# Altium PCB gecko3-template.PcbDoc
Units mm, origin at the board's own origin, x right, y up, seen from the top; angles counter-clockwise.
Board outline 85.5 x 54.02 mm, 2 copper layers (Top Layer, Bottom Layer), stack 0.146 mm thick; 4 components, 567 nets, 490 pads, 0 vias.
Unrouted connection lines stored in the file: 262.
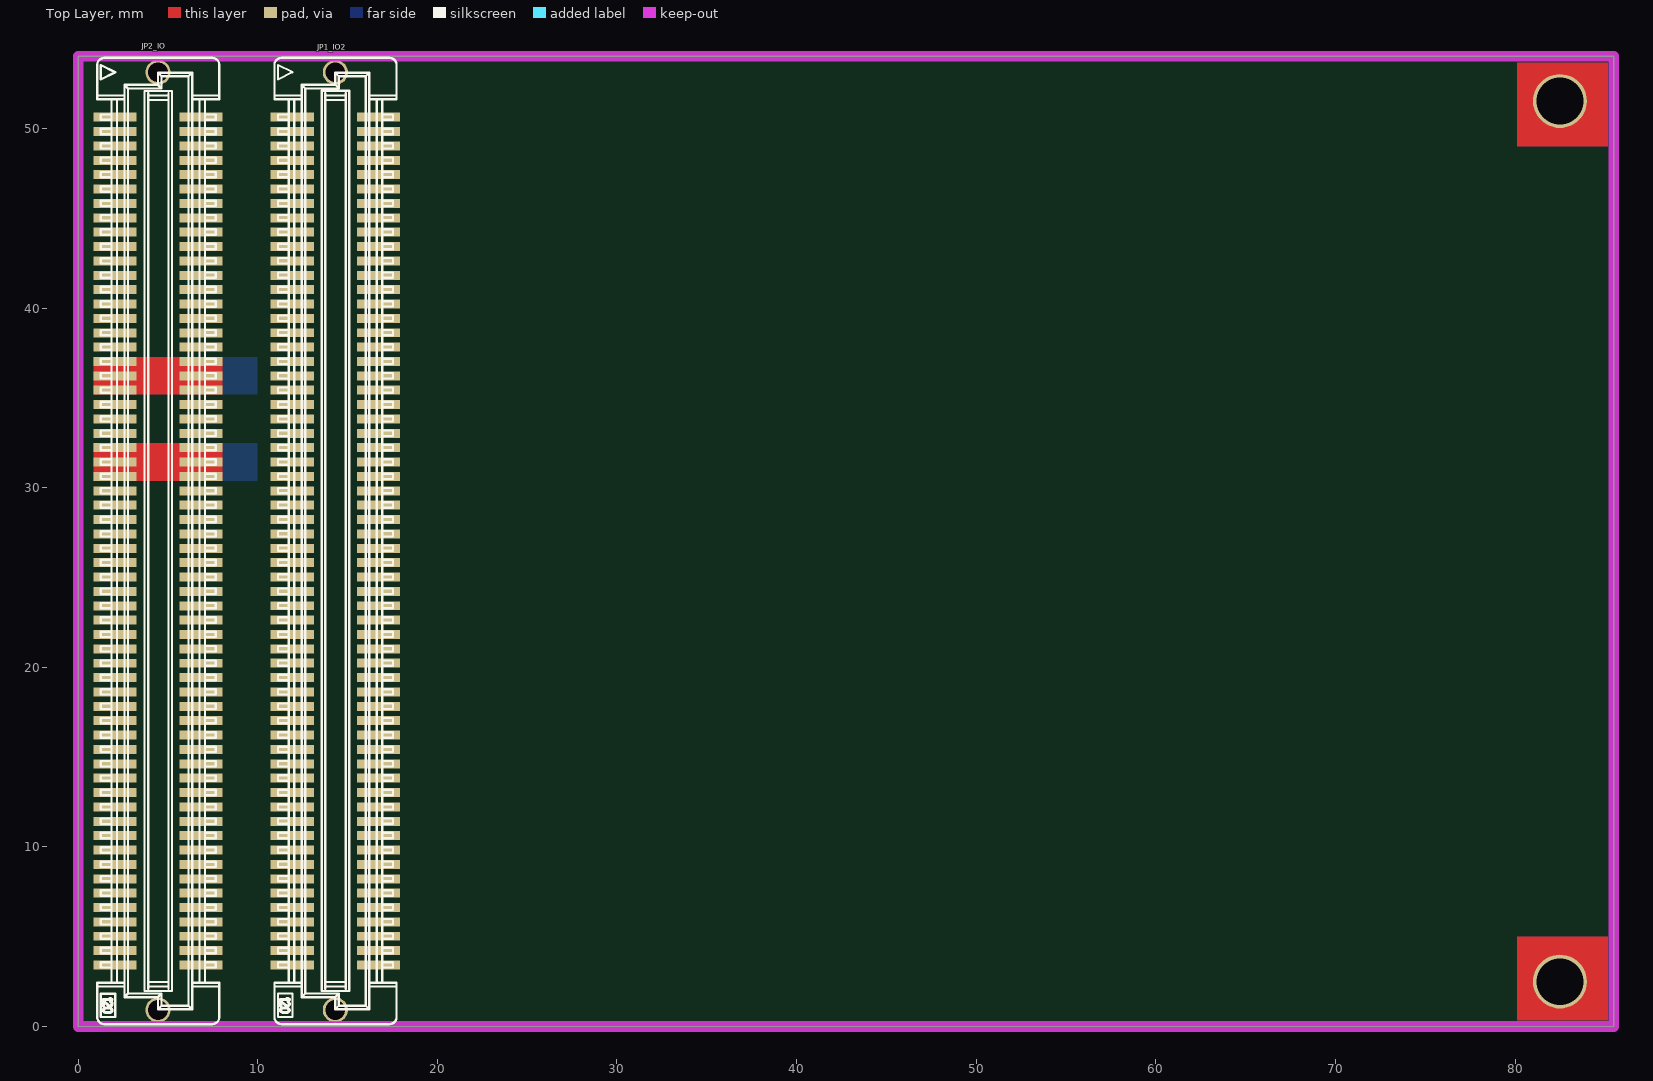
[diagram p0: Top Layer view]
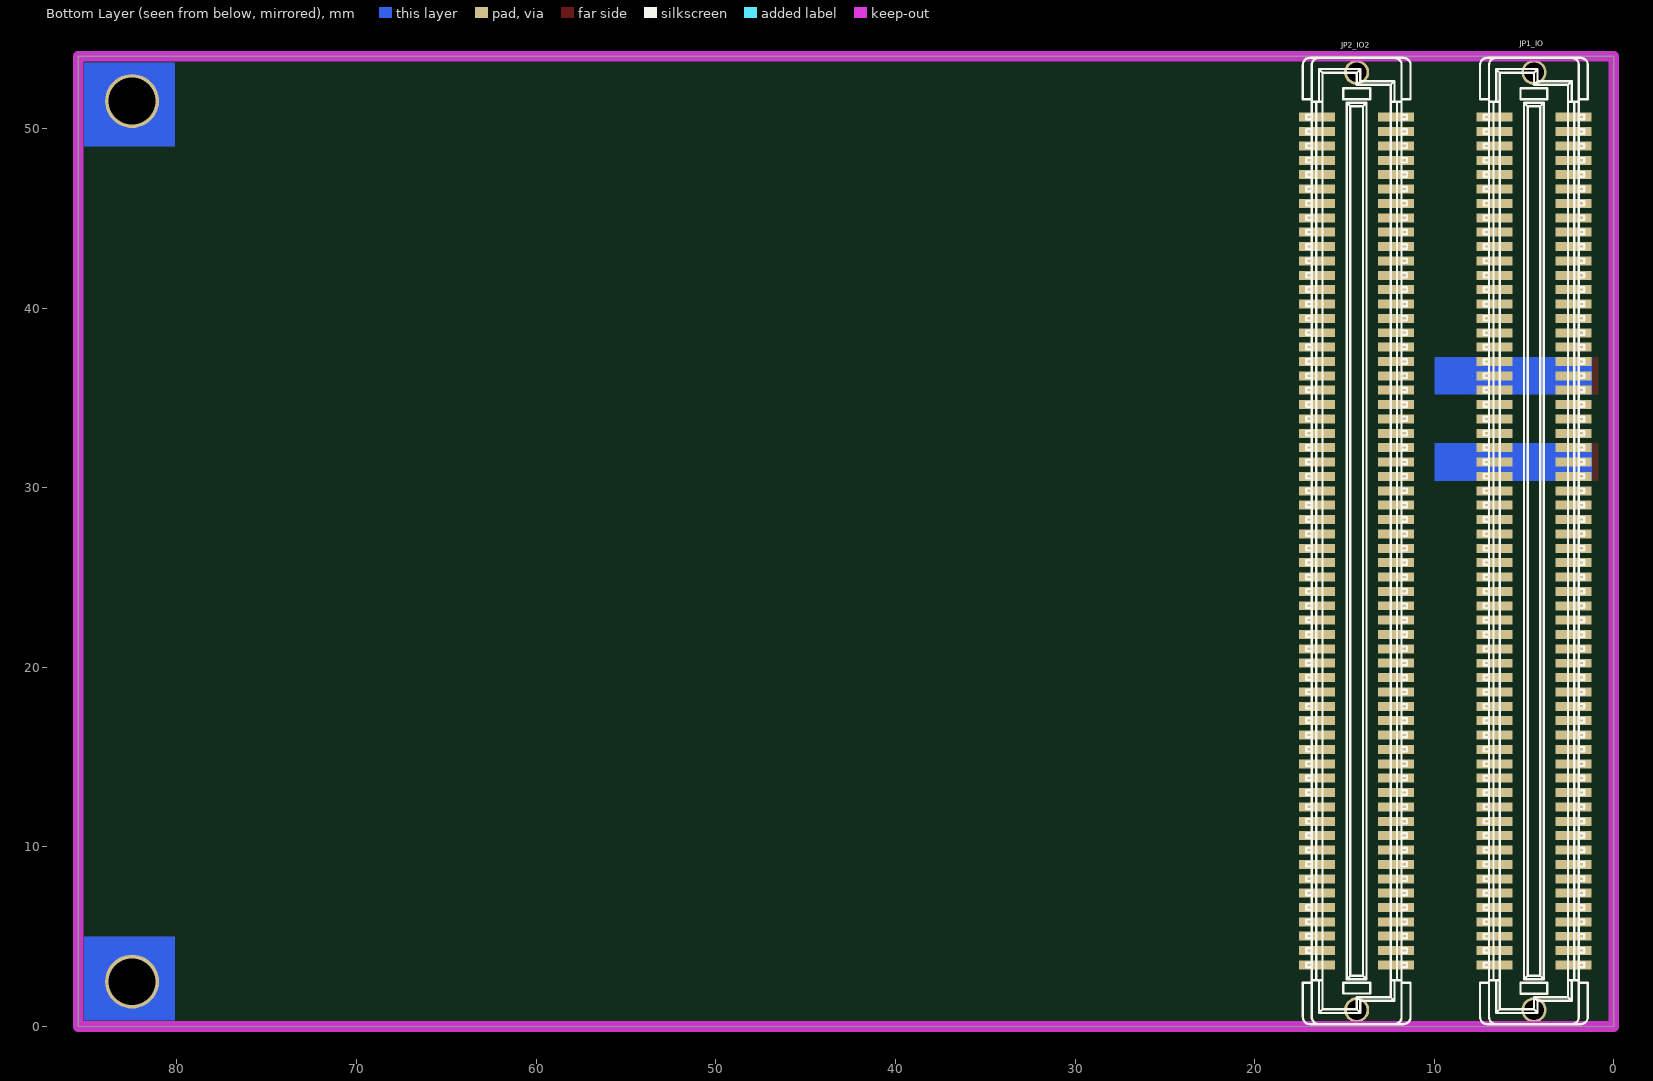
[diagram p1: Bottom Layer view, seen from below]

## Layer stack, top to bottom
Top Layer: signal copper 0.018
Dielectric: prepreg 0.11, FR-4, Dk 4.8
Bottom Layer: signal copper 0.018

## Board outline
0,0 0,54.025 85.5,54.025 85.5,0.025

## Design rules (kind name [scope] priority, off if disabled: settings)
Clearance Clearance_keepout [OnLayer('Keep-Out Layer')] p1: gap=0
Clearance Clearance_earth [InNet('EARTH')] p2: gap=0.6
Clearance Clearance_plane [InNet('1.2V') vs InNet('2.5V')] p3: gap=0.2
Clearance Clearance_1 [All] p4: gap=0.125
ComponentClearance [OnLayer('Multi-Layer')] p1: gap=0.2 collisioncheckmode=3 verticalgap=0
ComponentClearance ComponentClearanceBottom [OnLayer('Bottom Layer') vs OnLayer('Bottom Layer')] p2: gap=0.2 collisioncheckmode=2 verticalgap=0.254
ComponentClearance ComponentClearanceTop [OnLayer('Top Layer') vs OnLayer('Top Layer')] p3: gap=0.2 collisioncheckmode=2 verticalgap=0.254
DiffPairsRouting [All] p1: maxlimit=0.6 minlimit=0.254 mostfreqgap=0.254 toplayer_maxgap=0.254 bottomlayer_maxgap=0.254 maxuncoupledlength=12.7
Height Height_connector [InComponentClass('io-bus') Or InComponentClass('io-bus2')] p1: minheight=0 maxheight=25.4 prefheight=12.7
Height "Height on back side" [OnLayer('Bottom Layer')] p2: minheight=0 maxheight=2 prefheight=1
HoleSize [All] p1: absolutevalues=TRUE maxlimit=5 minlimit=0.15 maxpercent=80.000 minpercent=20.000
MatchedLengths "Schematic Matched Net Lengths_4" [InNetClass('ram')] p1: tolerance=3.6 amplitude=2.54 gap=0.508 style=90-Degree
MatchedLengths "Schematic Matched Net Lengths_3" [InNetClass('ram')] p2: tolerance=3.6 amplitude=2.54 gap=0.508 style=90-Degree
MatchedLengths "Schematic Matched Net Lengths_2" [InNetClass('ram-clock')] p3: tolerance=1 amplitude=2.54 gap=0.508 style=90-Degree
MatchedLengths "Schematic Matched Net Lengths_1" [InNetClass('ram-clock')] p4: tolerance=1 amplitude=2.54 gap=0.508 style=90-Degree
MatchedLengths "Schematic Matched Net Lengths" [InNetClass('usb-d')] p5: tolerance=1 amplitude=2.54 gap=0.508 style=90-Degree
MaxMinImpedance "Schematic Impedance Constraint_4" [InNetClass('usb-d')] p1: minimum=79.00 maximum=100.0
MaxMinImpedance "Schematic Impedance Constraint_3" [InNetClass('ram')] p2: minimum=40.00 maximum=70.00
MaxMinImpedance "Schematic Impedance Constraint_2" [InNetClass('ram')] p3: minimum=40.00 maximum=70.00
MaxMinImpedance "Schematic Impedance Constraint_1" [InNetClass('ram-clock')] p4: minimum=40.00 maximum=70.00
MaxMinImpedance "Schematic Impedance Constraint" [InNetClass('ram-clock')] p5: minimum=40.00 maximum=70.00
MaximumViaCount "Schematic Maximum Via Count Constraint_3" [InNetClass('ram-clock')] p1: limit=2
MaximumViaCount "Schematic Maximum Via Count Constraint_2" [InNetClass('ram-clock')] p2: limit=2
MaximumViaCount "Schematic Maximum Via Count Constraint_1" [InNetClass('ram')] p3: limit=2
MaximumViaCount "Schematic Maximum Via Count Constraint" [InNetClass('ram')] p4: limit=2
OvershootFalling "Schematic Overshoot - Falling Edge_3" [InNetClass('ram')] p1: maximum=300.0m
OvershootFalling "Schematic Overshoot - Falling Edge_2" [InNetClass('ram-clock')] p2: maximum=300.0m
OvershootFalling "Schematic Overshoot - Falling Edge_1" [InNetClass('ram-clock')] p3: maximum=300.0m
OvershootFalling "Schematic Overshoot - Falling Edge" [InNetClass('ram')] p4: maximum=300.0m
OvershootRising "Schematic Overshoot - Rising Edge_3" [InNetClass('ram-clock')] p1: maximum=300.0m
OvershootRising "Schematic Overshoot - Rising Edge_2" [InNetClass('ram')] p2: maximum=300.0m
OvershootRising "Schematic Overshoot - Rising Edge_1" [InNetClass('ram-clock')] p3: maximum=300.0m
OvershootRising "Schematic Overshoot - Rising Edge" [InNetClass('ram')] p4: maximum=300.0m
PlaneClearance [All] p1: clearance=0.2
PlaneConnect [All] p1: planeconnectstyle=Direct reliefexpansion=0.508 reliefentries=4 reliefconductorwidth=0.254 reliefairgap=0.254
PolygonConnect [All] p1: connectstyle=Direct reliefconductorwidth=0.254 reliefentries=4 polygonreliefangle="90 Angle"
RoomDefinition io-bus [InComponentClass('io-bus')] p1: confinementstyle=ConfineIn formatcopy=TRUE lockcomponents=FALSE outline 0.536,-0.186 0.536,54.249 0.936,54.249 7.964,54.249 8.364,54.249 8.364,54.248 8.364,-0.186
RoomDefinition io-bus2 [InComponentClass('io-bus2')] p2: confinementstyle=ConfineIn formatcopy=TRUE lockcomponents=FALSE outline 10.404,-0.186 10.404,54.249 10.804,54.25 17.832,54.25 18.232,54.249 18.232,-0.186
RoutingVias [All] p1: holewidth=0.2 width=0.45 viastyle="Through Hole" minholewidth=0.15 minwidth=0.35 maxholewidth=1 maxwidth=2
SignalStimulus "Schematic Signal Stimulus_3" [InNetClass('ram')] p1: kind=2 level=0 starttime=0.000 stoptime=1.800n periodtime=3.600n
SignalStimulus "Schematic Signal Stimulus_2" [InNetClass('ram-clock')] p2: kind=2 level=0 starttime=0.000 stoptime=1.800n periodtime=3.600n
SignalStimulus "Schematic Signal Stimulus_1" [InNetClass('ram')] p3: kind=2 level=0 starttime=0.000 stoptime=1.800n periodtime=3.600n
SignalStimulus "Schematic Signal Stimulus" [InNetClass('ram-clock')] p4: kind=2 level=0 starttime=0.000 stoptime=1.800n periodtime=3.600n
SolderMaskExpansion [All] p1: expansion=0.102
SupplyNets "Schematic Supply Nets_4" [InNet('2.5V')] p1: voltage=2.500
SupplyNets "Schematic Supply Nets_5" [InNet('2.5V')] p2: voltage=2.500
SupplyNets "Schematic Supply Nets_2" [InNet('VREF')] p3: voltage=1.250
SupplyNets "Schematic Supply Nets_3" [InNet('VREF')] p4: voltage=1.250
SupplyNets "Schematic Supply Nets" [InNet('GND')] p5: voltage=0.000
SupplyNets "Schematic Supply Nets_1" [InNet('GND')] p6: voltage=0.000
TestPointUsage [All] p1: valid=0 allowmultiple=FALSE
Testpoint [All] p1: side=15 testpointundercomponent=TRUE minsize=1.016 maxsize=2.54 preferedsize=1.524 minholesize=0 maxholesize=1.016 preferedholesize=0.813 testpointgrid=0.025 style=1023 order=0-112345678
UndershootFalling "Schematic Undershoot - Falling Edge_3" [InNetClass('ram')] p1: maximum=300.0m
UndershootFalling "Schematic Undershoot - Falling Edge_2" [InNetClass('ram')] p2: maximum=300.0m
UndershootFalling "Schematic Undershoot - Falling Edge_1" [InNetClass('ram-clock')] p3: maximum=300.0m
UndershootFalling "Schematic Undershoot - Falling Edge" [InNetClass('ram-clock')] p4: maximum=300.0m
UndershootRising "Schematic Undershoot - Rising Edge_3" [InNetClass('ram')] p1: maximum=300.0m
UndershootRising "Schematic Undershoot - Rising Edge_2" [InNetClass('ram')] p2: maximum=300.0m
UndershootRising "Schematic Undershoot - Rising Edge_1" [InNetClass('ram-clock')] p3: maximum=300.0m
UndershootRising "Schematic Undershoot - Rising Edge" [InNetClass('ram-clock')] p4: maximum=300.0m
Width [All] p1: maxlimit=5 minlimit=0.1 preferedwidth=0.2 minimp=50.000000 maximp=50.000000 favimp=50.000000
13 further rules are at their usual default settings.

## Classes and differential pairs
net class ram: DRAM_A0_0 DRAM_A0_1 DRAM_A0_2 DRAM_A0_3 DRAM_A0_4 DRAM_A0_5 DRAM_A0_6 DRAM_A0_7 DRAM_A0_8 DRAM_A0_9 DRAM_A0_10 DRAM_A0_11 DRAM_A0_12 DRAM_A0_13 DRAM_A1_0 DRAM_A1_1 DRAM_A1_2 DRAM_A1_3 DRAM_A1_4 DRAM_A1_5 DRAM_A1_6 DRAM_A1_7 DRAM_A1_8 DRAM_A1_9 DRAM_A1_10 DRAM_A1_11 DRAM_A1_12 DRAM_A1_13 DRAM_BA0_0 DRAM_BA0_1 DRAM_BA1_0 DRAM_BA1_1 DRAM_C\A\S\0 DRAM_C\A\S\1 DRAM_C\K\0 DRAM_C\K\1 DRAM_C\S\0 DRAM_C\S\1 DRAM_CK0 DRAM_CK0_FB DRAM_CK1 DRAM_CK1_FB DRAM_CKE0 DRAM_CKE1 DRAM_D0_0 DRAM_D0_1 DRAM_D0_2 DRAM_D0_3 DRAM_D0_4 DRAM_D0_5 DRAM_D0_6 DRAM_D0_7 DRAM_D0_8 DRAM_D0_9 DRAM_D0_10 DRAM_D0_11 DRAM_D0_12 DRAM_D0_13 DRAM_D0_14 DRAM_D0_15 DRAM_D1_0 DRAM_D1_1 DRAM_D1_2 DRAM_D1_3 DRAM_D1_4 DRAM_D1_5 DRAM_D1_6 DRAM_D1_7 DRAM_D1_8 DRAM_D1_9 DRAM_D1_10 DRAM_D1_11 DRAM_D1_12 DRAM_D1_13 DRAM_D1_14 DRAM_D1_15 DRAM_LDM0 DRAM_LDM1 DRAM_LDQS0 DRAM_LDQS1 DRAM_R\A\S\0 DRAM_R\A\S\1 DRAM_UDM0 DRAM_UDM1 DRAM_UDQS0 DRAM_UDQS1 DRAM_W\E\0 DRAM_W\E\1
net class ram-clock: DRAM_C\K\0 DRAM_C\K\1 DRAM_CK0 DRAM_CK0_FB DRAM_CK1 DRAM_CK1_FB
net class FLASH_A[0..23]: FLASH_A0 FLASH_A1 FLASH_A2 FLASH_A3 FLASH_A4 FLASH_A5 FLASH_A6 FLASH_A7 FLASH_A8 FLASH_A9 FLASH_A10 FLASH_A11 FLASH_A12 FLASH_A13 FLASH_A14 FLASH_A15 FLASH_A16 FLASH_A17 FLASH_A18 FLASH_A19 FLASH_A20 FLASH_A21 FLASH_A22 FLASH_A23
net class DRAM_D1_[0..15]: DRAM_D1_0 DRAM_D1_1 DRAM_D1_2 DRAM_D1_3 DRAM_D1_4 DRAM_D1_5 DRAM_D1_6 DRAM_D1_7 DRAM_D1_8 DRAM_D1_9 DRAM_D1_10 DRAM_D1_11 DRAM_D1_12 DRAM_D1_13 DRAM_D1_14 DRAM_D1_15
net class DRAM_D0_[0..15]: DRAM_D0_0 DRAM_D0_1 DRAM_D0_2 DRAM_D0_3 DRAM_D0_4 DRAM_D0_5 DRAM_D0_6 DRAM_D0_7 DRAM_D0_8 DRAM_D0_9 DRAM_D0_10 DRAM_D0_11 DRAM_D0_12 DRAM_D0_13 DRAM_D0_14 DRAM_D0_15 DRAM_DQ0 DRAM_DQ1 DRAM_DQ2 DRAM_DQ3 DRAM_DQ4 DRAM_DQ5 DRAM_DQ6 DRAM_DQ7 DRAM_DQ8 DRAM_DQ9 DRAM_DQ10 DRAM_DQ11 DRAM_DQ12 DRAM_DQ13 DRAM_DQ14 DRAM_DQ15
component class fpga2: C1_FP2 C2_FP2
net class D[0..15]: D0 D1 D2 D3 D4 D5 D6 D7 D8 D9 D10 D11 D12 D13 D14 D15
net class ENCODER[0..7]: ENCODER0 ENCODER1 ENCODER2 ENCODER3 ENCODER4 ENCODER5 ENCODER6 ENCODER7
net class PWM[0..7]: PWM0 PWM1 PWM2 PWM3 PWM4 PWM5 PWM6 PWM7
net class SWITCH[0..3]: SWITCH0 SWITCH1 SWITCH2 SWITCH3
component class io-bus2: JP1_IO2 JP2_IO2
component class spi-flash: U1_SPI
net class LED[0..7]: LED0 LED1 LED2 LED3 LED4 LED5 LED6 LED7
net class RXD_[0..3]: RXD_0 RXD_1 RXD_2 RXD_3
net class TXD_[0..3]: TXD_0 TXD_1 TXD_2 TXD_3
net class usb-d: NetJP1_USB_D+ NetJP1_USB_D-
net class BUTTON[0..2]: BUTTON0 BUTTON1 BUTTON2
net class DRAM_A0_[0..13]: DRAM_A0 DRAM_A0_0 DRAM_A0_1 DRAM_A0_2 DRAM_A0_3 DRAM_A0_4 DRAM_A0_5 DRAM_A0_6 DRAM_A0_7 DRAM_A0_8 DRAM_A0_9 DRAM_A0_10 DRAM_A0_11 DRAM_A0_12 DRAM_A0_13 DRAM_A1 DRAM_A2 DRAM_A3 DRAM_A4 DRAM_A5 DRAM_A6 DRAM_A7 DRAM_A8 DRAM_A9 DRAM_A10 DRAM_A11 DRAM_A12 DRAM_A13
net class DRAM_A1_[0..13]: DRAM_A1_0 DRAM_A1_1 DRAM_A1_2 DRAM_A1_3 DRAM_A1_4 DRAM_A1_5 DRAM_A1_6 DRAM_A1_7 DRAM_A1_8 DRAM_A1_9 DRAM_A1_10 DRAM_A1_11 DRAM_A1_12 DRAM_A1_13 DRAM_A1_14 DRAM_A1_15
net class FLASH_D0_[0..15]: FLASH_D0_0 FLASH_D0_1 FLASH_D0_2 FLASH_D0_3 FLASH_D0_4 FLASH_D0_5 FLASH_D0_6 FLASH_D0_7 FLASH_D0_8 FLASH_D0_9 FLASH_D0_10 FLASH_D0_11 FLASH_D0_12 FLASH_D0_13 FLASH_D0_14 FLASH_D0_15
net class FLASH_D1_[0..15]: FLASH_D1_0 FLASH_D1_1 FLASH_D1_2 FLASH_D1_3 FLASH_D1_4 FLASH_D1_5 FLASH_D1_6 FLASH_D1_7 FLASH_D1_8 FLASH_D1_9 FLASH_D1_10 FLASH_D1_11 FLASH_D1_12 FLASH_D1_13 FLASH_D1_14 FLASH_D1_15
net class GPIO1_[0..51]: GPIO1_0 GPIO1_1 GPIO1_2 GPIO1_3 GPIO1_4 GPIO1_5 GPIO1_6 GPIO1_7 GPIO1_8 GPIO1_9 GPIO1_10 GPIO1_11 GPIO1_12 GPIO1_13 GPIO1_14 GPIO1_15 GPIO1_16 GPIO1_17 GPIO1_18 GPIO1_19 GPIO1_20 GPIO1_21 GPIO1_22 GPIO1_23 GPIO1_24 GPIO1_25 GPIO1_26 GPIO1_27 GPIO1_28 GPIO1_29 GPIO1_30 GPIO1_31 GPIO1_32 GPIO1_33 GPIO1_34 GPIO1_35 GPIO1_36 GPIO1_37 GPIO1_38 GPIO1_39 GPIO1_40 GPIO1_41 GPIO1_42 GPIO1_43 GPIO1_44 GPIO1_45 GPIO1_46 GPIO1_47 GPIO1_48 GPIO1_49 GPIO1_50 GPIO1_51
net class GPIO2_[0..115]: GPIO2_0 GPIO2_1 GPIO2_2 GPIO2_3 GPIO2_4 GPIO2_5 GPIO2_6 GPIO2_7 GPIO2_8 GPIO2_9 GPIO2_10 GPIO2_11 GPIO2_12 GPIO2_13 GPIO2_14 GPIO2_15 GPIO2_16 GPIO2_17 GPIO2_18 GPIO2_19 GPIO2_20 GPIO2_21 GPIO2_22 GPIO2_23 GPIO2_24 GPIO2_25 GPIO2_26 GPIO2_27 GPIO2_28 GPIO2_29 GPIO2_30 GPIO2_31 GPIO2_32 GPIO2_33 GPIO2_34 GPIO2_35 GPIO2_36 GPIO2_37 GPIO2_38 GPIO2_39 GPIO2_40 GPIO2_41 GPIO2_42 GPIO2_43 GPIO2_44 GPIO2_45 GPIO2_46 GPIO2_47 GPIO2_48 GPIO2_49 GPIO2_50 GPIO2_51 GPIO2_52 GPIO2_53 GPIO2_54 GPIO2_55 GPIO2_56 GPIO2_57 GPIO2_58 GPIO2_59 GPIO2_60 GPIO2_61 GPIO2_62 GPIO2_63 GPIO2_64 GPIO2_65 GPIO2_66 GPIO2_67 GPIO2_68 GPIO2_69 GPIO2_70 GPIO2_71 GPIO2_72 GPIO2_73 GPIO2_74 GPIO2_75 GPIO2_76 GPIO2_77 GPIO2_78 GPIO2_79 GPIO2_80 GPIO2_81 GPIO2_82 GPIO2_83 GPIO2_84 GPIO2_85 GPIO2_86 GPIO2_87 GPIO2_88 GPIO2_89 GPIO2_90 GPIO2_91 GPIO2_92 GPIO2_93 GPIO2_94 GPIO2_95 GPIO2_96 GPIO2_97 GPIO2_98 GPIO2_99 GPIO2_100 GPIO2_101 GPIO2_102 GPIO2_103 GPIO2_104 GPIO2_105 GPIO2_106 GPIO2_107 GPIO2_108 GPIO2_109 GPIO2_110 GPIO2_111 GPIO2_112 GPIO2_113 GPIO2_114 GPIO2_115
differential pair usb_data: +NetJP1_USB_D+ -NetJP1_USB_D-
differential pair DRAM_clk0: +DRAM_CK0 -DRAM_C\K\0
differential pair DRAM_clk1: +DRAM_CK1 -DRAM_C\K\1
differential pair eth_rd: +RD+ -RD-
differential pair eth_td: +TD+ -TD-

## Components (designator, comment, footprint, x,y, rotation, side; value= is the part's Value field where it differs from the comment)
JP1_IO "AMP-FH-120-Plug" amp_FH_.8mm_120pin_plug 4.45,27.025 r270 bottom
JP1_IO2 "AMP-FH-120-RECEPTABLE-H9-H13" amp_FH_.8mm_120pin_r_H9_H13 14.318,27.026 r270 top
JP2_IO "AMP-FH-120-RECEPTABLE-H9-H13" amp_FH_.8mm_120pin_r_H9_H13 4.45,27.025 r270 top
JP2_IO2 "AMP-FH-120-Plug" amp_FH_.8mm_120pin_plug 14.318,27.026 r270 bottom

## Footprints (in the part's own frame and the unit in brackets; to place one, negate y for a bottom-side part, rotate by r counter-clockwise, add the part's x,y. Pads: shape width x height; smd on the part's side, far side on the other; paste and mask are expansions set on the pad)
amp_FH_.8mm_120pin_plug [mm] "AMP Free Height System, 0.8mm, 100 Pin, all Heights, Plug"
  round 1.1 hole 0.8 paste-0.05 mask+0.06: 0(-26.1,0)
  round 1.4 hole 1.1 paste-0.05 mask+0.06: 0(26.1,0)
  rect 0.5x2 smd paste-0.05 mask+0.06: 1(-23.6,2.2) 2(-23.6,-2.2) 3(-22.8,2.2) 4(-22.8,-2.2) 5(-22,2.2) 6(-22,-2.2) 7(-21.2,2.2) 8(-21.2,-2.2) 9(-20.4,2.2) 10(-20.4,-2.2) 11(-19.6,2.2) 12(-19.6,-2.2) 13(-18.8,2.2) 14(-18.8,-2.2) 15(-18,2.2) 16(-18,-2.2) 17(-17.2,2.2) 18(-17.2,-2.2) 19(-16.4,2.2) 20(-16.4,-2.2) 21(-15.6,2.2) 22(-15.6,-2.2) 23(-14.8,2.2) 24(-14.8,-2.2) 25(-14,2.2) 26(-14,-2.2) 27(-13.2,2.2) 28(-13.2,-2.2) 29(-12.4,2.2) 30(-12.4,-2.2) 31(-11.6,2.2) 32(-11.6,-2.2) 33(-10.8,2.2) 34(-10.8,-2.2) 35(-10,2.2) 36(-10,-2.2) 37(-9.2,2.2) 38(-9.2,-2.2) 39(-8.4,2.2) 40(-8.4,-2.2) 41(-7.6,2.2) 42(-7.6,-2.2) 43(-6.8,2.2) 44(-6.8,-2.2) 45(-6,2.2) 46(-6,-2.2) 47(-5.2,2.2) 48(-5.2,-2.2) 49(-4.4,2.2) 50(-4.4,-2.2) 51(-3.6,2.2) 52(-3.6,-2.2) 53(-2.8,2.2) 54(-2.8,-2.2) 55(-2,2.2) 56(-2,-2.2) 57(-1.2,2.2) 58(-1.2,-2.2) 59(-0.4,2.2) 60(-0.4,-2.2) 61(0.4,2.2) 62(0.4,-2.2) 63(1.2,2.2) 64(1.2,-2.2) 65(2,2.2) 66(2,-2.2) 67(2.8,2.2) 68(2.8,-2.2) 69(3.6,2.2) 70(3.6,-2.2) 71(4.4,2.2) 72(4.4,-2.2) 73(5.2,2.2) 74(5.2,-2.2) 75(6,2.2) 76(6,-2.2) 77(6.8,2.2) 78(6.8,-2.2) 79(7.6,2.2) 80(7.6,-2.2) 81(8.4,2.2) 82(8.4,-2.2) 83(9.2,2.2) 84(9.2,-2.2) 85(10,2.2) 86(10,-2.2) 87(10.8,2.2) 88(10.8,-2.2) 89(11.6,2.2) 90(11.6,-2.2) 91(12.4,2.2) 92(12.4,-2.2) 93(13.2,2.2) 94(13.2,-2.2) 95(14,2.2) 96(14,-2.2) 97(14.8,2.2) 98(14.8,-2.2) 99(15.6,2.2) 100(15.6,-2.2) 101(16.4,2.2) 102(16.4,-2.2) 103(17.2,2.2) 104(17.2,-2.2) 105(18,2.2) 106(18,-2.2) 107(18.8,2.2) 108(18.8,-2.2) 109(19.6,2.2) 110(19.6,-2.2) 111(20.4,2.2) 112(20.4,-2.2) 113(21.2,2.2) 114(21.2,-2.2) 115(22,2.2) 116(22,-2.2) 117(22.8,2.2) 118(22.8,-2.2) 119(23.6,2.2) 120(23.6,-2.2)
  silkscreen extent -26.91,-3 26.89,3
amp_FH_.8mm_120pin_r_H9_H13 [mm] "AMP Free Height System, 0.8mm, 120 Pin, 9 or 13mm Heigth, Receptacle"
  round 1.4 hole 1.1 paste-0.05 mask+0.06: 0(-26.1,0)
  round 1.1 hole 0.8 paste-0.05 mask+0.06: 0(26.1,0)
  rect 0.5x2.4 smd paste-0.05 mask+0.06: 1(-23.6,-2.4) 2(-23.6,2.4) 3(-22.8,-2.4) 4(-22.8,2.4) 5(-22,-2.4) 6(-22,2.4) 7(-21.2,-2.4) 8(-21.2,2.4) 9(-20.4,-2.4) 10(-20.4,2.4) 11(-19.6,-2.4) 12(-19.6,2.4) 13(-18.8,-2.4) 14(-18.8,2.4) 15(-18,-2.4) 16(-18,2.4) 17(-17.2,-2.4) 18(-17.2,2.4) 19(-16.4,-2.4) 20(-16.4,2.4) 21(-15.6,-2.4) 22(-15.6,2.4) 23(-14.8,-2.4) 24(-14.8,2.4) 25(-14,-2.4) 26(-14,2.4) 27(-13.2,-2.4) 28(-13.2,2.4) 29(-12.4,-2.4) 30(-12.4,2.4) 31(-11.6,-2.4) 32(-11.6,2.4) 33(-10.8,-2.4) 34(-10.8,2.4) 35(-10,-2.4) 36(-10,2.4) 37(-9.2,-2.4) 38(-9.2,2.4) 39(-8.4,-2.4) 40(-8.4,2.4) 41(-7.6,-2.4) 42(-7.6,2.4) 43(-6.8,-2.4) 44(-6.8,2.4) 45(-6,-2.4) 46(-6,2.4) 47(-5.2,-2.4) 48(-5.2,2.4) 49(-4.4,-2.4) 50(-4.4,2.4) 51(-3.6,-2.4) 52(-3.6,2.4) 53(-2.8,-2.4) 54(-2.8,2.4) 55(-2,-2.4) 56(-2,2.4) 57(-1.2,-2.4) 58(-1.2,2.4) 59(-0.4,-2.4) 60(-0.4,2.4) 61(0.4,-2.4) 62(0.4,2.4) 63(1.2,-2.4) 64(1.2,2.4) 65(2,-2.4) 66(2,2.4) 67(2.8,-2.4) 68(2.8,2.4) 69(3.6,-2.4) 70(3.6,2.4) 71(4.4,-2.4) 72(4.4,2.4) 73(5.2,-2.4) 74(5.2,2.4) 75(6,-2.4) 76(6,2.4) 77(6.8,-2.4) 78(6.8,2.4) 79(7.6,-2.4) 80(7.6,2.4) 81(8.4,-2.4) 82(8.4,2.4) 83(9.2,-2.4) 84(9.2,2.4) 85(10,-2.4) 86(10,2.4) 87(10.8,-2.4) 88(10.8,2.4) 89(11.6,-2.4) 90(11.6,2.4) 91(12.4,-2.4) 92(12.4,2.4) 93(13.2,-2.4) 94(13.2,2.4) 95(14,-2.4) 96(14,2.4) 97(14.8,-2.4) 98(14.8,2.4) 99(15.6,-2.4) 100(15.6,2.4) 101(16.4,-2.4) 102(16.4,2.4) 103(17.2,-2.4) 104(17.2,2.4) 105(18,-2.4) 106(18,2.4) 107(18.8,-2.4) 108(18.8,2.4) 109(19.6,-2.4) 110(19.6,2.4) 111(20.4,-2.4) 112(20.4,2.4) 113(21.2,-2.4) 114(21.2,2.4) 115(22,-2.4) 116(22,2.4) 117(22.8,-2.4) 118(22.8,2.4) 119(23.6,-2.4) 120(23.6,2.4)
  silkscreen extent -26.91,-3.39 26.89,3.41

## Part data
JP1_IO JP2_IO2: "AMP Free Height System, 0.8mm, 120 Pin, Plug"
JP1_IO2 JP2_IO: "AMP Free Height System, 0.8mm, 120 Pin, 9 or 13mm Height, Receptable"

## Free pads (board coordinates)
  round 3 hole 2.6 paste-0.05 mask+0.06: 0(82.5,2.5) 0(82.5,51.525)

## Nets (pads, with @x,y where several pads share a name; then routed paths per layer and width w, separated by ;. In a path a pad name is that pad's centre, name@x,y a point inside that pad or via, vN(x,y) a via of type N, cw(c..) or ccw(c..) an arc to the next point about the centre after c; other vN are vias at no path point)
1.2V: 
2.5V: 
3.3V: 
BUSY/RDYX: 
BUTTON0: 
BUTTON1: 
BUTTON2: 
CCLK: 
CLK: 
COL: 
CRS: 
CS_B/RDYU: 
D0: 
D1: 
D2: 
D3: 
D4: 
D5: 
D6: 
D7: 
D8: 
D9: 
D10: 
D11: 
D12: 
D13: 
D14: 
D15: 
DONE: 
DRAM_A0_0: 
DRAM_A0_1: 
DRAM_A0_2: 
DRAM_A0_3: 
DRAM_A0_4: 
DRAM_A0_5: 
DRAM_A0_6: 
DRAM_A0_7: 
DRAM_A0_8: 
DRAM_A0_9: 
DRAM_A0_10: 
DRAM_A0_11: 
DRAM_A0_12: 
DRAM_A0_13: 
DRAM_A1_0: 
DRAM_A1_1: 
DRAM_A1_2: 
DRAM_A1_3: 
DRAM_A1_4: 
DRAM_A1_5: 
DRAM_A1_6: 
DRAM_A1_7: 
DRAM_A1_8: 
DRAM_A1_9: 
DRAM_A1_10: 
DRAM_A1_11: 
DRAM_A1_12: 
DRAM_A1_13: 
DRAM_BA0_0: 
DRAM_BA0_1: 
DRAM_BA1_0: 
DRAM_BA1_1: 
DRAM_C\A\S\0: 
DRAM_C\A\S\1: 
DRAM_C\K\0: 
DRAM_C\K\1: 
DRAM_C\S\0: 
DRAM_C\S\1: 
DRAM_CK0: 
DRAM_CK0_FB: 
DRAM_CK1: 
DRAM_CK1_FB: 
DRAM_CKE0: 
DRAM_CKE1: 
DRAM_D0_0: 
DRAM_D0_1: 
DRAM_D0_2: 
DRAM_D0_3: 
DRAM_D0_4: 
DRAM_D0_5: 
DRAM_D0_6: 
DRAM_D0_7: 
DRAM_D0_8: 
DRAM_D0_9: 
DRAM_D0_10: 
DRAM_D0_11: 
DRAM_D0_12: 
DRAM_D0_13: 
DRAM_D0_14: 
DRAM_D0_15: 
DRAM_D1_0: 
DRAM_D1_1: 
DRAM_D1_2: 
DRAM_D1_3: 
DRAM_D1_4: 
DRAM_D1_5: 
DRAM_D1_6: 
DRAM_D1_7: 
DRAM_D1_8: 
DRAM_D1_9: 
DRAM_D1_10: 
DRAM_D1_11: 
DRAM_D1_12: 
DRAM_D1_13: 
DRAM_D1_14: 
DRAM_D1_15: 
DRAM_LDM0: 
DRAM_LDM1: 
DRAM_LDQS0: 
DRAM_LDQS1: 
DRAM_R\A\S\0: 
DRAM_R\A\S\1: 
DRAM_UDM0: 
DRAM_UDM1: 
DRAM_UDQS0: 
DRAM_UDQS1: 
DRAM_W\E\0: 
DRAM_W\E\1: 
EARTH: 
ENCODER0: JP1_IO.62 JP2_IO.62
ENCODER1: JP1_IO.64 JP2_IO.64
ENCODER2: JP1_IO.66 JP2_IO.66
ENCODER3: JP1_IO.68 JP2_IO.68
ENCODER4: JP1_IO.70 JP2_IO.70
ENCODER5: JP1_IO.72 JP2_IO.72
ENCODER6: JP1_IO.74 JP2_IO.74
ENCODER7: JP1_IO.76 JP2_IO.76
ETH_R\E\S\E\T\: 
EXTCLK0: JP1_IO.7 JP2_IO.7
EXTCLK1: JP1_IO.10 JP2_IO.10
FLASH_A0: 
FLASH_A1: 
FLASH_A2: 
FLASH_A3: 
FLASH_A4: 
FLASH_A5: 
FLASH_A6: 
FLASH_A7: 
FLASH_A8: 
FLASH_A9: 
FLASH_A10: 
FLASH_A11: 
FLASH_A12: 
FLASH_A13: 
FLASH_A14: 
FLASH_A15: 
FLASH_A16: 
FLASH_A17: 
FLASH_A18: 
FLASH_A19: 
FLASH_A20: 
FLASH_A21: 
FLASH_A22: 
FLASH_A23: 
FLASH_B\Y\T\E\: 
FLASH_C\E\0\: 
FLASH_D0_0: 
FLASH_D0_1: 
FLASH_D0_2: 
FLASH_D0_3: 
FLASH_D0_4: 
FLASH_D0_5: 
FLASH_D0_6: 
FLASH_D0_7: 
FLASH_D0_8: 
FLASH_D0_9: 
FLASH_D0_10: 
FLASH_D0_11: 
FLASH_D0_12: 
FLASH_D0_13: 
FLASH_D0_14: 
FLASH_D0_15: 
FLASH_D1_0: 
FLASH_D1_1: 
FLASH_D1_2: 
FLASH_D1_3: 
FLASH_D1_4: 
FLASH_D1_5: 
FLASH_D1_6: 
FLASH_D1_7: 
FLASH_D1_8: 
FLASH_D1_9: 
FLASH_D1_10: 
FLASH_D1_11: 
FLASH_D1_12: 
FLASH_D1_13: 
FLASH_D1_14: 
FLASH_D1_15: 
FLASH_O\E\: 
FLASH_R\P\: 
FLASH_W\E\: 
GND: JP1_IO2.1 JP1_IO2.2 JP1_IO2.119 JP1_IO2.120 JP1_IO.1 JP1_IO.2 JP1_IO.5 JP1_IO.8 JP1_IO.9 JP1_IO.12 JP1_IO.29 JP1_IO.30 JP1_IO.33 JP1_IO.34 JP1_IO.41 JP1_IO.42 JP1_IO.43 JP1_IO.44 JP1_IO.45 JP1_IO.46 JP1_IO.53 JP1_IO.54 JP1_IO.55 JP1_IO.56 JP1_IO.59 JP1_IO.60 JP1_IO.89 JP1_IO.90 JP1_IO.119 JP1_IO.120 JP2_IO2.1 JP2_IO2.2 JP2_IO2.119 JP2_IO2.120 JP2_IO.1 JP2_IO.2 JP2_IO.5 JP2_IO.8 JP2_IO.9 JP2_IO.12 JP2_IO.29 JP2_IO.30 JP2_IO.33 JP2_IO.34 JP2_IO.41 JP2_IO.42 JP2_IO.43 JP2_IO.44 JP2_IO.45 JP2_IO.46 JP2_IO.53 JP2_IO.54 JP2_IO.55 JP2_IO.56 JP2_IO.59 JP2_IO.60 JP2_IO.89 JP2_IO.90 JP2_IO.119 JP2_IO.120 pad.0
GPIO1_0: JP1_IO.4 JP2_IO.4
GPIO1_1: JP1_IO.6 JP2_IO.6
GPIO1_2: JP1_IO.11 JP2_IO.11
GPIO1_3: JP1_IO.14 JP2_IO.14
GPIO1_4: JP1_IO.13 JP2_IO.13
GPIO1_5: JP1_IO.16 JP2_IO.16
GPIO1_6: JP1_IO.15 JP2_IO.15
GPIO1_7: JP1_IO.18 JP2_IO.18
GPIO1_8: JP1_IO.17 JP2_IO.17
GPIO1_9: JP1_IO.20 JP2_IO.20
GPIO1_10: JP1_IO.19 JP2_IO.19
GPIO1_11: JP1_IO.22 JP2_IO.22
GPIO1_12: JP1_IO.21 JP2_IO.21
GPIO1_13: JP1_IO.24 JP2_IO.24
GPIO1_14: JP1_IO.23 JP2_IO.23
GPIO1_15: JP1_IO.26 JP2_IO.26
GPIO1_16: JP1_IO.25 JP2_IO.25
GPIO1_17: JP1_IO.28 JP2_IO.28
GPIO1_18: JP1_IO.27 JP2_IO.27
GPIO1_19: JP1_IO.84 JP2_IO.84
GPIO1_20: JP1_IO.85 JP2_IO.85
GPIO1_21: JP1_IO.86 JP2_IO.86
GPIO1_22: JP1_IO.87 JP2_IO.87
GPIO1_23: JP1_IO.88 JP2_IO.88
GPIO1_24: JP1_IO.91 JP2_IO.91
GPIO1_25: JP1_IO.92 JP2_IO.92
GPIO1_26: JP1_IO.93 JP2_IO.93
GPIO1_27: JP1_IO.94 JP2_IO.94
GPIO1_28: JP1_IO.95 JP2_IO.95
GPIO1_29: JP1_IO.96 JP2_IO.96
GPIO1_30: JP1_IO.97 JP2_IO.97
GPIO1_31: JP1_IO.98 JP2_IO.98
GPIO1_32: JP1_IO.99 JP2_IO.99
GPIO1_33: JP1_IO.100 JP2_IO.100
GPIO1_34: JP1_IO.101 JP2_IO.101
GPIO1_35: JP1_IO.102 JP2_IO.102
GPIO1_36: JP1_IO.103 JP2_IO.103
GPIO1_37: JP1_IO.104 JP2_IO.104
GPIO1_38: JP1_IO.105 JP2_IO.105
GPIO1_39: JP1_IO.106 JP2_IO.106
GPIO1_40: JP1_IO.107 JP2_IO.107
GPIO1_41: JP1_IO.108 JP2_IO.108
GPIO1_42: JP1_IO.109 JP2_IO.109
GPIO1_43: JP1_IO.110 JP2_IO.110
GPIO1_44: JP1_IO.111 JP2_IO.111
GPIO1_45: JP1_IO.112 JP2_IO.112
GPIO1_46: JP1_IO.113 JP2_IO.113
GPIO1_47: JP1_IO.114 JP2_IO.114
GPIO1_48: JP1_IO.115 JP2_IO.115
GPIO1_49: JP1_IO.116 JP2_IO.116
GPIO1_50: JP1_IO.117 JP2_IO.117
GPIO1_51: JP1_IO.118 JP2_IO.118
GPIO2_0: JP1_IO2.3 JP2_IO2.3
GPIO2_1: JP1_IO2.4 JP2_IO2.4
GPIO2_2: JP1_IO2.5 JP2_IO2.5
GPIO2_3: JP1_IO2.6 JP2_IO2.6
GPIO2_4: JP1_IO2.7 JP2_IO2.7
GPIO2_5: JP1_IO2.8 JP2_IO2.8
GPIO2_6: JP1_IO2.9 JP2_IO2.9
GPIO2_7: JP1_IO2.10 JP2_IO2.10
GPIO2_8: JP1_IO2.11 JP2_IO2.11
GPIO2_9: JP1_IO2.12 JP2_IO2.12
GPIO2_10: JP1_IO2.13 JP2_IO2.13
GPIO2_11: JP1_IO2.14 JP2_IO2.14
GPIO2_12: JP1_IO2.15 JP2_IO2.15
GPIO2_13: JP1_IO2.16 JP2_IO2.16
GPIO2_14: JP1_IO2.17 JP2_IO2.17
GPIO2_15: JP1_IO2.18 JP2_IO2.18
GPIO2_16: JP1_IO2.19 JP2_IO2.19
GPIO2_17: JP1_IO2.20 JP2_IO2.20
GPIO2_18: JP1_IO2.21 JP2_IO2.21
GPIO2_19: JP1_IO2.22 JP2_IO2.22
GPIO2_20: JP1_IO2.23 JP2_IO2.23
GPIO2_21: JP1_IO2.24 JP2_IO2.24
GPIO2_22: JP1_IO2.25 JP2_IO2.25
GPIO2_23: JP1_IO2.26 JP2_IO2.26
GPIO2_24: JP1_IO2.27 JP2_IO2.27
GPIO2_25: JP1_IO2.28 JP2_IO2.28
GPIO2_26: JP1_IO2.29 JP2_IO2.29
GPIO2_27: JP1_IO2.30 JP2_IO2.30
GPIO2_28: JP1_IO2.31 JP2_IO2.31
GPIO2_29: JP1_IO2.32 JP2_IO2.32
GPIO2_30: JP1_IO2.33 JP2_IO2.33
GPIO2_31: JP1_IO2.34 JP2_IO2.34
GPIO2_32: JP1_IO2.35 JP2_IO2.35
GPIO2_33: JP1_IO2.36 JP2_IO2.36
GPIO2_34: JP1_IO2.37 JP2_IO2.37
GPIO2_35: JP1_IO2.38 JP2_IO2.38
GPIO2_36: JP1_IO2.39 JP2_IO2.39
GPIO2_37: JP1_IO2.40 JP2_IO2.40
GPIO2_38: JP1_IO2.41 JP2_IO2.41
GPIO2_39: JP1_IO2.42 JP2_IO2.42
GPIO2_40: JP1_IO2.43 JP2_IO2.43
GPIO2_41: JP1_IO2.44 JP2_IO2.44
GPIO2_42: JP1_IO2.45 JP2_IO2.45
GPIO2_43: JP1_IO2.46 JP2_IO2.46
GPIO2_44: JP1_IO2.47 JP2_IO2.47
GPIO2_45: JP1_IO2.48 JP2_IO2.48
GPIO2_46: JP1_IO2.49 JP2_IO2.49
GPIO2_47: JP1_IO2.50 JP2_IO2.50
GPIO2_48: JP1_IO2.51 JP2_IO2.51
GPIO2_49: JP1_IO2.52 JP2_IO2.52
GPIO2_50: JP1_IO2.53 JP2_IO2.53
GPIO2_51: JP1_IO2.54 JP2_IO2.54
GPIO2_52: JP1_IO2.55 JP2_IO2.55
GPIO2_53: JP1_IO2.56 JP2_IO2.56
GPIO2_54: JP1_IO2.57 JP2_IO2.57
GPIO2_55: JP1_IO2.58 JP2_IO2.58
GPIO2_56: JP1_IO2.59 JP2_IO2.59
GPIO2_57: JP1_IO2.60 JP2_IO2.60
GPIO2_58: JP1_IO2.61 JP2_IO2.61
GPIO2_59: JP1_IO2.62 JP2_IO2.62
GPIO2_60: JP1_IO2.63 JP2_IO2.63
GPIO2_61: JP1_IO2.64 JP2_IO2.64
GPIO2_62: JP1_IO2.65 JP2_IO2.65
GPIO2_63: JP1_IO2.66 JP2_IO2.66
GPIO2_64: JP1_IO2.67 JP2_IO2.67
GPIO2_65: JP1_IO2.68 JP2_IO2.68
GPIO2_66: JP1_IO2.69 JP2_IO2.69
GPIO2_67: JP1_IO2.70 JP2_IO2.70
GPIO2_68: JP1_IO2.71 JP2_IO2.71
GPIO2_69: JP1_IO2.72 JP2_IO2.72
GPIO2_70: JP1_IO2.73 JP2_IO2.73
GPIO2_71: JP1_IO2.74 JP2_IO2.74
GPIO2_72: JP1_IO2.75 JP2_IO2.75
GPIO2_73: JP1_IO2.76 JP2_IO2.76
GPIO2_74: JP1_IO2.77 JP2_IO2.77
GPIO2_75: JP1_IO2.78 JP2_IO2.78
GPIO2_76: JP1_IO2.79 JP2_IO2.79
GPIO2_77: JP1_IO2.80 JP2_IO2.80
GPIO2_78: JP1_IO2.81 JP2_IO2.81
GPIO2_79: JP1_IO2.82 JP2_IO2.82
GPIO2_80: JP1_IO2.83 JP2_IO2.83
GPIO2_81: JP1_IO2.84 JP2_IO2.84
GPIO2_82: JP1_IO2.85 JP2_IO2.85
GPIO2_83: JP1_IO2.86 JP2_IO2.86
GPIO2_84: JP1_IO2.87 JP2_IO2.87
GPIO2_85: JP1_IO2.88 JP2_IO2.88
GPIO2_86: JP1_IO2.89 JP2_IO2.89
GPIO2_87: JP1_IO2.90 JP2_IO2.90
GPIO2_88: JP1_IO2.91 JP2_IO2.91
GPIO2_89: JP1_IO2.92 JP2_IO2.92
GPIO2_90: JP1_IO2.93 JP2_IO2.93
GPIO2_91: JP1_IO2.94 JP2_IO2.94
GPIO2_92: JP1_IO2.95 JP2_IO2.95
GPIO2_93: JP1_IO2.96 JP2_IO2.96
GPIO2_94: JP1_IO2.97 JP2_IO2.97
GPIO2_95: JP1_IO2.98 JP2_IO2.98
GPIO2_96: JP1_IO2.99 JP2_IO2.99
GPIO2_97: JP1_IO2.100 JP2_IO2.100
GPIO2_98: JP1_IO2.101 JP2_IO2.101
GPIO2_99: JP1_IO2.102 JP2_IO2.102
GPIO2_100: JP1_IO2.103 JP2_IO2.103
GPIO2_101: JP1_IO2.104 JP2_IO2.104
GPIO2_102: JP1_IO2.105 JP2_IO2.105
GPIO2_103: JP1_IO2.106 JP2_IO2.106
GPIO2_104: JP1_IO2.107 JP2_IO2.107
GPIO2_105: JP1_IO2.108 JP2_IO2.108
GPIO2_106: JP1_IO2.109 JP2_IO2.109
GPIO2_107: JP1_IO2.110 JP2_IO2.110
GPIO2_108: JP1_IO2.111 JP2_IO2.111
GPIO2_109: JP1_IO2.112 JP2_IO2.112
GPIO2_110: JP1_IO2.113 JP2_IO2.113
GPIO2_111: JP1_IO2.114 JP2_IO2.114
GPIO2_112: JP1_IO2.115 JP2_IO2.115
GPIO2_113: JP1_IO2.116 JP2_IO2.116
GPIO2_114: JP1_IO2.117 JP2_IO2.117
GPIO2_115: JP1_IO2.118 JP2_IO2.118
IFCLK: 
INIT_B/WRX: 
LED0: 
LED1: 
LED2: 
LED3: 
LED4: 
LED5: 
LED6: 
LED7: 
LINESENSORCLK: JP1_IO.82 JP2_IO.82
LINESENSORIN1: JP1_IO.77 JP2_IO.77
LINESENSORIN2: JP1_IO.79 JP2_IO.79
LINESENSOROUT1: JP1_IO.78 JP2_IO.78
LINESENSOROUT2: JP1_IO.80 JP2_IO.80
"LOW BATTERY": JP1_IO.57 JP2_IO.57
MDC: 
MDIO: 
MISO: 
MOSI: 
NetC1_PWR_2: 
NetC2_PWR_2: 
NetC2_USB_2: 
NetC3_PWR_2: 
NetC3_USB_2: 
NetC4_ETH_2: 
NetC4_USB_2: 
NetC6_ETH_2: 
NetC6_PWR_2: 
NetC9_ETH_2: 
NetC10_ETH_2: 
NetC22_PWR_1: 
NetD1_ETH_2: 
NetD1_ETH_4: 
NetD1_I2C_1: 
NetD1_I2C_3: 
NetD1_SW_1: 
NetD1_SW_3: 
NetD2_SW_1: 
NetD2_SW_3: 
NetD3_SW_1: 
NetD3_SW_3: 
NetD4_SW_1: 
NetD4_SW_3: 
NetFB1_IO_2: JP1_IO.35 JP1_IO.36 JP1_IO.37 JP1_IO.38 JP1_IO.39 JP1_IO.40 JP2_IO.35 JP2_IO.36 JP2_IO.37 JP2_IO.38 JP2_IO.39 JP2_IO.40
NetFB1_USB_1: 
NetFB1_USB_2: 
NetFB2_IO_2: JP1_IO.47 JP1_IO.48 JP1_IO.49 JP1_IO.50 JP1_IO.51 JP1_IO.52 JP2_IO.47 JP2_IO.48 JP2_IO.49 JP2_IO.50 JP2_IO.51 JP2_IO.52
NetJP1_JTAG_1: 
NetJP1_JTAG_2: 
NetJP1_JTAG_4: 
NetJP1_USB_D+: 
NetJP1_USB_D-: 
NetL1_PWR_1: 
NetQ1_FP1_3: 
NetR1_ETH_2: 
NetR1_I2C_2: 
NetR2_ETH_2: 
NetR2_I2C_2: 
NetR2_PWR_1: 
NetR3_CNF_2: 
NetR3_FL_1: 
NetR3_I2C_1: 
NetR4_CNF_2: 
NetR4_ETH_1: 
NetR4_FL_1: 
NetR4_USB_1: 
NetR5_ETH_1: 
NetR6_USB_1: 
NetR10_ETH_2: 
NetR11_ETH_2: 
NetRA1_R0_5: 
NetRA1_R0_6: 
NetRA1_R0_7: 
NetRA1_R0_8: 
NetRA1_R1_5: 
NetRA1_R1_6: 
NetRA1_R1_7: 
NetRA1_R1_8: 
NetRA2_R0_5: 
NetRA2_R0_6: 
NetRA2_R0_7: 
NetRA2_R0_8: 
NetRA2_R1_5: 
NetRA2_R1_6: 
NetRA2_R1_7: 
NetRA2_R1_8: 
NetRA3_R0_5: 
NetRA3_R0_6: 
NetRA3_R0_7: 
NetRA3_R0_8: 
NetRA3_R1_5: 
NetRA3_R1_6: 
NetRA3_R1_7: 
NetRA3_R1_8: 
NetRA4_R0_5: 
NetRA4_R0_6: 
NetRA4_R0_7: 
NetRA4_R0_8: 
NetRA4_R1_5: 
NetRA4_R1_6: 
NetRA4_R1_7: 
NetRA4_R1_8: 
NetRA5_R0_1: 
NetRA5_R0_2: 
NetRA5_R0_3: 
NetRA5_R0_4: 
NetRA5_R1_1: 
NetRA5_R1_2: 
NetRA5_R1_3: 
NetRA5_R1_4: 
NetRA6_R0_1: 
NetRA6_R0_2: 
NetRA6_R0_3: 
NetRA6_R0_4: 
NetRA6_R1_1: 
NetRA6_R1_2: 
NetRA6_R1_3: 
NetRA6_R1_4: 
NetRA7_R0_1: 
NetRA7_R0_2: 
NetRA7_R0_3: 
NetRA7_R0_4: 
NetRA7_R1_1: 
NetRA7_R1_2: 
NetRA7_R1_3: 
NetRA7_R1_4: 
NetRA8_R0_1: 
NetRA8_R0_2: 
NetRA8_R0_3: 
NetRA8_R0_4: 
NetRA8_R1_1: 
NetRA8_R1_2: 
NetRA8_R1_3: 
NetRA8_R1_4: 
NetRA9_R0_1: 
NetRA9_R0_2: 
NetRA9_R0_3: 
NetRA9_R0_4: 
NetRA9_R1_1: 
NetRA9_R1_2: 
NetRA9_R1_3: 
NetRA9_R1_4: 
NetRA10_R0_5: 
NetRA10_R0_6: 
NetRA10_R0_7: 
NetRA10_R1_5: 
NetRA10_R1_6: 
NetRA10_R1_7: 
NetRA11_R0_5: 
NetRA11_R0_6: 
NetRA11_R0_7: 
NetRA11_R0_8: 
NetRA11_R1_5: 
NetRA11_R1_6: 
NetRA11_R1_7: 
NetRA11_R1_8: 
NetS1_I2C_2: 
"POWER GOOD": JP1_IO.58 JP2_IO.58
PROG_B: 
PWM0: JP1_IO.61 JP2_IO.61
PWM1: JP1_IO.63 JP2_IO.63
PWM2: JP1_IO.65 JP2_IO.65
PWM3: JP1_IO.67 JP2_IO.67
PWM4: JP1_IO.69 JP2_IO.69
PWM5: JP1_IO.71 JP2_IO.71
PWM6: JP1_IO.73 JP2_IO.73
PWM7: JP1_IO.75 JP2_IO.75
PWR_DOWN/INT: 
RD+: 
RD-: 
RDWR_B/WRU: 
RESET: JP1_IO.3 JP2_IO.3
RX_CLK: 
RX_DV: 
RX_ER: 
RXD_0: 
RXD_1: 
RXD_2: 
RXD_3: 
SCL: 
SCL_EXT: JP1_IO.83 JP2_IO.83
SCLK: 
SDA: 
SDA_EXT: JP1_IO.81 JP2_IO.81
"SERIAL IN": 
"SERIAL OUT": 
SPI_CS_F: 
SWITCH0: 
SWITCH1: 
SWITCH2: 
SWITCH3: 
TCK: 
TD+: 
TD-: 
TDI: 
TDO: 
TMS: 
TX_CLK: 
TX_EN: 
TXD_0: 
TXD_1: 
TXD_2: 
TXD_3: 
UBATT: 
VBUS: JP1_IO.31 JP1_IO.32 JP2_IO.31 JP2_IO.32
VBUS_SW: 
VREF: 
pads on no net: JP1_IO2.0 JP1_IO.0 JP2_IO2.0 JP2_IO.0

## Keep-outs
Keep-Out Layer:
  lines w0.6: 0,0 85.5,0 85.5,54.025 0,54.025 0,0

## Other copper
Top Layer:
  rectangle net NetFB2_IO_2: 0.85,30.375 8.05,32.475
  rectangle net NetFB1_IO_2: 0.85,35.175 8.05,37.275
  rectangle net GND: 80.1,0.325 85.175,5
  rectangle net GND: 80.1,49 85.175,53.675
Bottom Layer:
  rectangle net NetFB2_IO_2: 1.225,30.375 9.975,32.475
  rectangle net NetFB1_IO_2: 1.225,35.175 9.975,37.275
  region net GND: 85.175,5 80.1,5 80.1,0.325 85.175,0.325
  region net GND: 85.175,53.675 80.1,53.675 80.1,49 85.175,49

## Silkscreen, mask and mechanical layers (free items; w line width, h text height)
Mechanical 1:
  lines w0.1: 0,0 85.5,0 85.5,54.025 0,54.025 0,0
Mechanical 2:
  lines w0.254: 0.05,11.775 8.85,11.775 8.85,42.275 0.05,42.275
  text "2.60 Diameter" at 76.375,60.35 h1.5
  text "all in mm" at -0.05,-17.075 h1.5

## Dimensions
0,0 to 0,54.025 on Mechanical 2
0,0 to 85.5,0.025 on Mechanical 2
0,0 to 17.906,-0.127 on Mechanical 2
0,0 to 14.318,0.926 on Mechanical 2
0,0 to 4.45,0.925 on Mechanical 2
85.45,0.025 to 85.45,5.025 on Mechanical 2
85.5,0.025 to 80.1,5 on Mechanical 2
85.5,54.025 to 82.5,51.525 on Mechanical 2
82.5,51.525 to 85.5,54.025 on Mechanical 2